# Altium PCB 主板-霍尔BC接地.PcbDoc (part 5 of 6)
Units mm, origin at the board's own origin, x right, y up, seen from the top; angles counter-clockwise.
Board outline 97.69 x 103.45 mm, 2 copper layers (Top Layer, Bottom Layer); 83 components, 83 nets, 266 pads, 295 vias.
Unrouted connection lines stored in the file: 11.
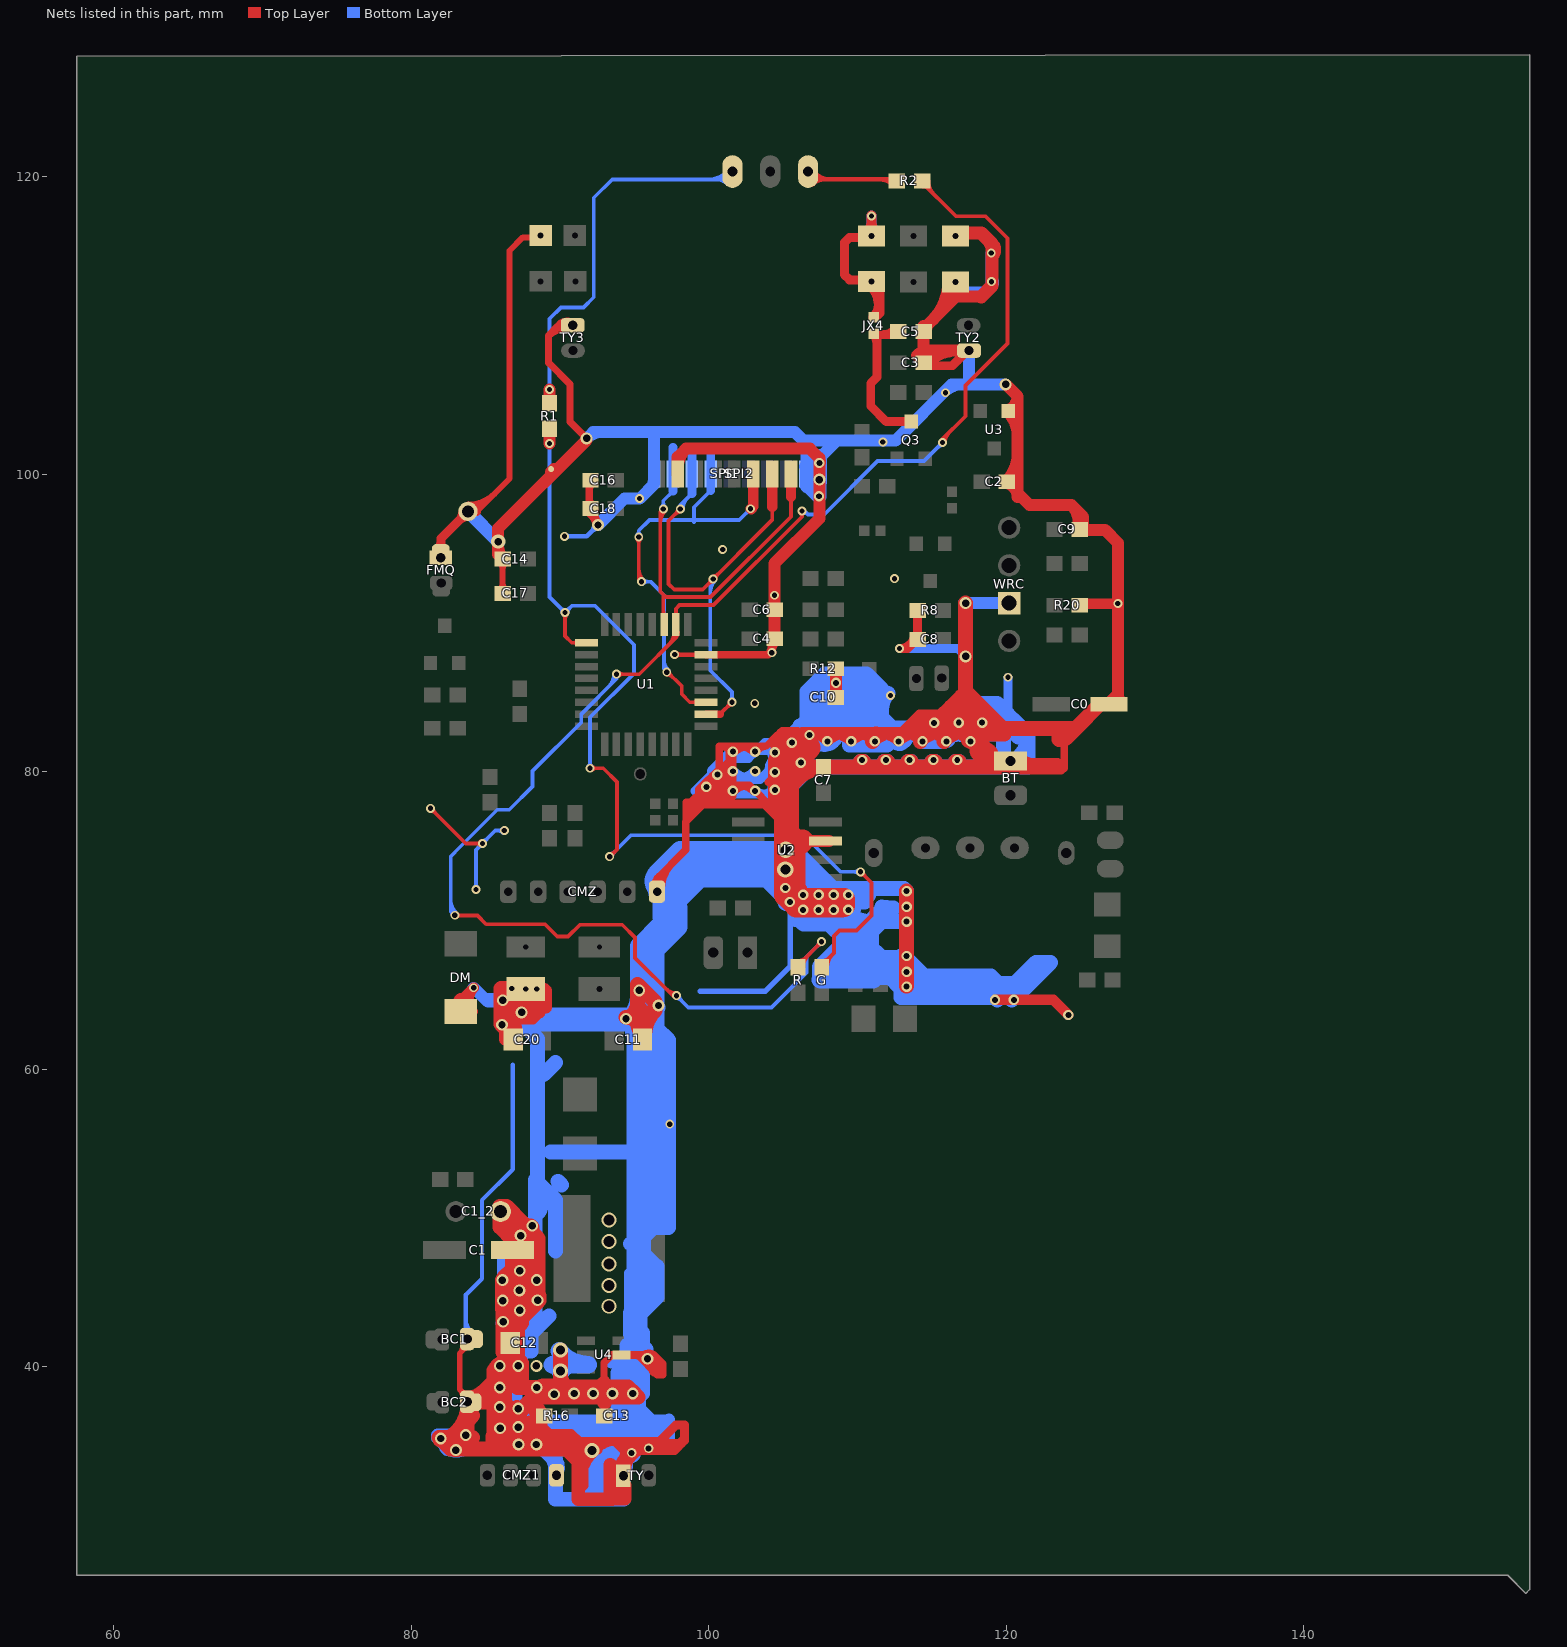
[diagram p5: the nets of this part, all layers, seen from the top]

## Via types
v1: diameter 0.6, hole 0.35, Top Layer to Bottom Layer, 117 vias
v2: diameter 0.7, hole 0.4, Top Layer to Bottom Layer, 104 vias
v3: diameter 0.8, hole 0.5, Top Layer to Bottom Layer, tented both sides, 32 vias
v4: diameter 0.8, hole 0.5, Top Layer to Bottom Layer, 15 vias
v5: diameter 1, hole 0.6, Top Layer to Bottom Layer, tented both sides, 5 vias
v6: diameter 1, hole 0.75, Top Layer to Bottom Layer, tented both sides, 5 vias
v7: diameter 3.4, hole 2.9, Top Layer to Bottom Layer, 4 vias
v8: diameter 0.65, hole 0.4, Top Layer to Bottom Layer, tented both sides, 2 vias
v9: diameter 0.8, hole 0.35, Top Layer to Bottom Layer, 2 vias
v10: diameter 0.7, hole 0.35, Top Layer to Bottom Layer, 2 vias
v11: diameter 1.1, hole 0.68, Top Layer to Bottom Layer, 2 vias
v12: diameter 0.62, hole 0.4, Top Layer to Bottom Layer, 1 vias
v13: diameter 0.95, hole 0.5, Top Layer to Bottom Layer, 1 vias
v14: diameter 0.9, hole 0.5, Top Layer to Bottom Layer, tented both sides, 1 vias
v15: diameter 0.7, hole 0.4, Top Layer to Bottom Layer, tented bottom, 1 vias
v16: diameter 0.8, hole 0.5, Top Layer to Bottom Layer, tented bottom, 1 vias

## Nets (pads, with @x,y where several pads share a name; then routed paths per layer and width w, separated by ;. In a path a pad name is that pad's centre, name@x,y a point inside that pad or via, vN(x,y) a via of type N, cw(c..) or ccw(c..) an arc to the next point about the centre after c; other vN are vias at no path point) (continued)
GND: (continued)
  Bottom Layer w1: 85.209,64.643 v3@86.081,64.643 ; v3@86.024,37.216 ccw(c84.601,38.64) 86.614,38.64 ; v3@86.024,38.679 cw(c84.601,37.255) 86.614,37.255 ; v3@86.024,39.985 ccw(c85.091,40.918) 86.411,40.918 ; v3@86.055,40.005 86.055,39 86.055,36.297 ; 86.081,65.303 v3@86.081,64.643 ; 86.157,63.754 v3@86.157,64.523 ; 86.157,64.037 cw(c87.22,64.037) pad.0@87.204,65.1 ; v3(86.157,64.643) v3@86.081,64.643 ; v3@86.182,42.928 ccw(c86.182,44.403) 87.226,43.36 ; v3@86.198,42.929 ccw(c86.042,43.911) 86.847,43.327 ; v3@86.228,44.521 cw(c85.785,44.078) 86.411,44.078 ; v3@86.258,42.933 86.258,47.6 v3@87.884,49.225 ; 86.385,42.672 86.385,42.52 86.411,42.545 ; 86.411,40.259 86.411,42.545 ; 86.411,41.715 ccw(c88.858,41.715) v3@87.127,39.985 ; 86.411,42.26 cw(c88.388,42.26) v3@87.242,43.871 ; v3@86.411,44.221 86.411,42.545 ; 86.487,42.723 86.643,42.879 ; pad.0@86.521,65.432 87.6,65.432 v10(86.766,65.43) pad.0@86.664,65.429 ; 86.581,36.297 cw(c86.581,35.324) v3@87.269,36.012 ; 86.614,36.195 cw(c87.969,36.195) v3@87.137,37.265 ; 86.614,36.386 86.614,38.938 86.614,39.167 86.843,38.938 ; 86.614,37.11 ccw(c88.367,37.11) 87.127,35.87 ccw(c88.122,36.865) 88.122,35.458 ; 86.614,38.355 ccw(c88.367,38.355) 87.127,37.115 ccw(c89.103,39.09) 89.103,36.297 ; pad.0@86.669,65.316 ccw(c87.241,65.987) pad.0@87.311,65.109 ; 86.792,43.094 cw(c87.689,43.094) v3@87.251,43.877 ; 86.792,43.187 cw(c87.54,43.187) v3@87.263,43.882 ; 86.792,43.314 86.792,43.466 ; 86.87,43.919 ccw(c85.654,45.136) v3@87.374,45.136 ; 86.919,35.458 93.472,35.458 93.294,35.636 93.426,35.636 92.954,36.108 ; 86.92,40.969 cw(c86.007,40.056) v3@87.298,40.056 ; 87.003,35.458 cw(c87.003,33.358) v3@88.488,34.843 ; 87.02,41.275 87.859,41.275 ; v3@87.103,35.97 ccw(c88.054,35.679) 87.351,34.976 86.055,36.271 ; v3@87.127,36.012 cw(c87.815,35.324) 87.815,36.297 ; v3@87.202,43.768 cw(c87.924,43.927) 87.401,44.45 86.589,43.637 cw(c87.21,43.015) v3@87.311,43.889 ; v3@87.205,35.841 cw(c87.102,37.318) 86.055,36.271 ; 87.219,43.353 ccw(c86.783,43.79) v3@87.4,43.79 ; v3@87.28,39.998 ccw(c86.857,40.298) 87.224,40.665 86.868,41.021 86.893,41.046 ; v3@87.292,37.15 cw(c86.055,37.619) 86.055,36.297 ; v3@87.329,63.851 ccw(c88.304,63.648) 87.6,62.944 ; v3@87.33,63.854 ccw(c88.246,63.631) 87.579,62.964 87.6,62.944 ; v3@87.345,45.065 ccw(c86.78,45.63) 87.579,45.63 ; v3@87.345,45.207 cw(c86.78,44.641) 87.579,44.641 ; v3@87.354,43.488 86.411,42.545 ; v3@87.371,46.386 ccw(c86.867,46.89) 87.579,46.89 ; v3@87.371,46.527 cw(c86.867,46.023) 87.579,46.023 ; v3@87.374,45.148 cw(c85.352,44.906) 86.792,43.466 ; v3@87.395,43.82 cw(c86.431,43.509) 87.147,42.792 87.916,43.561 ; 87.482,44.156 cw(c88.494,43.145) v3@88.494,44.575 ; v3@87.579,44.009 cw(c90.212,44.009) v3@88.373,45.893 ; 87.579,44.228 v3@87.579,48.895 ; 87.579,47.665 ccw(c90.286,47.665) v3@88.372,45.751 ; 87.884,44.558 86.792,43.466 ; v3@88.347,34.843 cw(c89.832,33.358) 89.832,35.458 ; v3(88.417,34.773) 88.824,34.773 ; 88.549,50.37 ccw(c87.943,50.859) 88.494,51.41 88.494,62.05 87.6,62.944 ; 88.9,59.639 89.713,60.452 ; 88.926,34.468 89.002,34.544 ; 88.925,34.773 88.824,34.773 ; 89.053,34.595 89.027,34.569 ; 89.129,34.9 88.697,34.9 88.773,34.823 88.824,34.773 ; 89.256,43.409 88.062,42.215 ; 89.293,34.101 cw(c88.143,32.95) 89.77,32.95 ccw(c89.047,33.244) 89.599,33.795 89.027,34.367 89.128,34.468 ; 89.332,34.468 89.129,34.468 ; 89.357,54.432 96.728,54.432 ; 89.672,36.108 92.954,36.108 ; 89.704,47.777 89.704,51.215 88.341,52.578 88.341,43.536 88.062,43.256 ; 89.713,33.757 89.713,31.09 92.903,31.09 94.285,31.09 94.285,31.787 93.844,31.787 ; 89.865,52.476 90.117,52.225 ; 91.774,33.455 ccw(c90.862,34.366) v5(92.151,34.366) ; 91.999,32.029 92.151,32.182 92.522,32.182 ; 92.001,32.125 91.663,31.787 ; 92.402,33.76 cw(c93.009,34.366) v5(92.151,34.366) ; 92.522,33.471 ccw(c91.256,33.471) v5(92.151,34.366) ; 92.522,33.551 ccw(c91.441,33.551) v5(92.151,34.366) ; 92.823,31.787 ccw(c92.823,33.846) TY.2@94.278,32.39 ; 92.954,31.14 93.574,31.14 ; 93.223,32.7 92.804,32.7 93.323,32.182 ; 93.271,33.376 cw(c93.271,31.951) TY.2@94.278,32.958 ; 93.505,31.691 93.601,31.787 ; 93.604,31.671 cw(c94.364,31.671) TY.2@94.261,32.424 ; 93.604,32.085 93.604,32.182 ; 93.604,32.796 cw(c94.231,32.796) TY.2@94.178,33.421 ; 93.955,35.636 93.955,34.976 93.98,34.95 94.386,34.95 94.488,34.849 ; TY.2@94.246,32.936 cw(c95.293,33.383) 94.488,34.188 ; TY.2@94.281,32.933 ccw(c93.648,33.349) 94.183,33.884 ; TY.2@94.283,32.951 ccw(c93.675,32.729) 93.675,33.376 ; TY.2@94.284,32.942 ccw(c92.78,33.141) 93.853,34.214 ; 94.488,33.883 cw(c95.094,33.883) v8@94.706,34.348 ; 94.488,35.707 94.488,34.849 ; 94.615,37.186 94.656,37.144 ; 94.656,36.432 94.656,37.144 ; 94.742,36.108 94.092,36.108 ; 94.755,48.273 95.326,48.844 ; 94.793,42.164 95.555,41.402 ; v4@94.846,38.114 ccw(c95.128,38.625) 95.54,38.212 ; v8@94.901,34.06 cw(c94.481,34.842) 93.853,34.214 ; 94.92,41.758 94.92,39.345 95.225,39.649 ; v4@94.934,38.293 cw(c94.693,37.735) 95.301,37.735 ; 94.971,48.844 95.326,48.844 ; 94.971,62.407 94.971,54.576 ; 95.098,49.835 95.758,50.495 ; 95.148,44.653 95.225,44.729 ; 95.148,46.228 95.148,46.076 ; 95.225,37.391 95.225,39.649 ; 95.225,37.646 ccw(c94.339,37.646) 94.965,38.272 cw(c94.155,37.462) 95.301,37.462 ; 95.225,38.757 cw(c94.339,38.757) 94.965,38.131 ccw(c93.577,39.519) 95.54,39.519 ; 95.225,44.12 95.225,44.729 ; 95.244,34.945 95.148,34.849 94.818,34.519 94.488,34.188 ; 95.326,48.057 95.326,48.844 ; 95.326,50.927 95.326,51.155 ; 95.326,62.763 95.326,54.576 94.971,54.576 ; 95.327,61.713 cw(c97.266,61.713) 95.895,63.084 ; 95.327,62.763 96.52,62.763 ; 95.542,48.628 95.898,48.984 ; 95.555,41.094 ccw(c96.441,41.094) v16@95.814,40.468 ; 95.631,47.498 95.631,48.412 ; 95.682,47.523 96.469,46.736 ; 95.733,48.819 95.898,48.984 ; 95.758,45.339 95.758,47.32 ; 95.824,63.084 cw(c94.758,62.017) 96.266,62.017 ; 95.838,63.074 cw(c95.5,62.386) 96.266,62.386 ; 95.858,63.069 cw(c95.831,62.381) 96.52,62.381 ; 95.898,44.552 95.898,45.402 95.225,44.729 ; 95.898,49.416 95.898,48.984 ; 95.904,63.142 ccw(c96.52,63.454) 96.52,62.763 ; 95.961,49.708 96.19,49.708 ; 96.284,35.456 96.314,35.486 94.656,37.144 ; 96.441,35.486 96.7,35.486 97.231,36.017 ; 96.52,46.761 96.52,44.653 95.377,43.51 95.377,42.469 95.555,42.291 95.555,41.402 ; 96.52,68.123 96.52,62.763 ; CMZ.2@96.53,71.944 97.206,71.944 ; 96.901,55.63 cw(c98.066,55.63) v1@97.242,56.453 ; 96.901,56.994 ccw(c98.066,56.994) v1@97.242,56.17 ; 96.977,49.708 96.622,49.708 95.898,48.984 ; 97.18,36.297 96.139,36.297 95.301,37.135 95.301,37.973 95.54,38.212 95.54,39.882 95.555,39.896 95.555,39.98 ; 103.745,72.836 105.994,70.587 ; 104.111,72.47 ccw(c105.156,73.514) v2@105.156,72.037 ; v2@104.295,79.985 cw(c105.527,79.985) 104.656,80.856 ; v2@104.303,79.935 cw(c104.97,80.17) 104.47,80.67 ; v2@104.445,78.641 ccw(c104.445,80.364) 105.663,79.145 ; v2@104.445,81.155 ccw(c104.445,82.387) 105.316,81.516 ; v2@104.485,81.161 ccw(c104.271,81.94) 105.08,81.94 ; v2@104.507,80.121 cw(c104.099,79.229) 105.08,79.229 ; v2@104.551,79.879 ccw(c103.274,81.155) 105.08,81.155 ; v2@104.551,81.411 cw(c103.275,80.135) 105.08,80.135 ; v2@104.563,80.077 cw(c103.915,79.572) v2@104.496,78.991 ; v2@104.578,81.375 cw(c104.044,81.096) 104.47,80.67 ; v2@105.006,72.187 ccw(c106.484,72.187) v2@105.439,71.142 ; 105.08,81.102 cw(c106.452,81.102) 105.482,82.072 cw(c106.36,81.194) 106.36,82.436 ; 105.08,81.457 cw(c105.77,81.457) v2@105.537,82.107 ; v11@105.181,74.702 cw(c105.181,73.11) 106.307,74.236 ; v11(105.181,74.752) 105.791,74.752 108.382,72.161 108.255,72.161 ; v2@105.438,81.966 cw(c106.241,81.966) 105.673,82.534 ; v2@105.467,82.054 cw(c106.219,81.503) 106.219,82.436 ; v2@105.611,82.114 ccw(c105.516,81.504) 105.08,81.94 ; v2@105.644,81.827 ccw(c105.36,82.533) 106.121,82.533 ; v2@105.694,81.86 ccw(c104.662,82.891) 106.121,82.891 ; 105.782,70.799 ccw(c106.35,71.367) v2@106.35,70.564 ; 105.789,79.271 ccw(c104.441,80.62) v2@106.347,80.62 ; 105.816,70.059 cw(c106.717,70.059) v2@106.276,70.844 ; 105.816,70.099 cw(c106.65,70.099) v2@106.284,70.848 ; v2@106.049,70.641 ccw(c104.961,71.73) v2@106.5,71.73 ; 106.136,72.507 106.451,72.822 ; 106.17,82.371 cw(c106.782,81.76) v2@106.782,82.624 ; v2@106.21,71.675 cw(c107.21,72.063) 106.451,72.822 ; v2@106.216,70.781 ccw(c106.991,70.388) 106.377,69.774 ; v2@106.478,71.807 cw(c105.89,71.453) 106.375,70.968 105.816,70.409 105.816,70.334 106.377,69.774 ; SPI2.8@106.649,99.21 cw(c108.994,99.21) v2@107.336,100.868 ; SPI2.8@106.649,99.963 cw(c107.617,99.963) v2@107.41,100.908 ; v2@106.652,82.398 ccw(c107.249,82.749) 107.249,82.057 ; v2@106.676,82.368 ccw(c107.427,83.119) 107.427,82.057 ; v2@106.755,82.326 cw(c106.89,83.083) 106.121,83.083 ; 106.772,70.485 107.823,70.485 108.382,69.926 ; v2@106.782,82.524 v2@106.87,82.436 ; v2@106.785,82.624 ccw(c106.731,80.289) 105.08,81.94 ; v2@106.812,82.327 cw(c106.657,83.069) 106.121,82.533 ; v2@106.852,82.341 cw(c106.599,82.816) 106.219,82.436 ; 106.959,73.33 106.451,72.822 ; v2@107.016,82.289 ccw(c107.975,83.248) v2@107.975,81.892 ; 107.172,82.525 cw(c107.172,81.239) 108.081,82.148 ccw(c107.387,81.454) 107.387,82.436 ; v2@107.213,71.755 107.569,72.111 ; v4@107.365,99.709 ccw(c108.035,99.145) v2(107.417,98.527) ; v4@107.405,99.551 cw(c107.849,100.666) 106.649,100.666 106.649,99.294 v2(107.417,98.527) ; v2@107.417,98.501 v2(107.417,98.527) ; v4@107.417,99.593 v2(107.417,98.527) ; v2@107.429,71.875 cw(c107.19,70.968) 108.128,70.968 ; v4@107.442,99.492 v4(107.442,99.644) v2(107.442,100.762) v2@107.442,101.092 ; v2@107.449,71.868 cw(c107.024,70.849) v2@108.128,70.849 ; 107.602,85.732 cw(c108.56,84.774) v2@108.56,86.129 ; v2@107.856,82.134 cw(c108.471,81.66) 108.471,82.436 107.975,82.436 ; v2@107.869,82.148 cw(c108.778,81.239) 108.778,82.525 ; 107.975,84.931 cw(c109.608,84.931) 108.454,86.085 cw(c109.669,84.869) 109.669,86.589 ; v2@107.991,81.893 ccw(c107.924,82.525) 108.56,82.525 ; v2@108.034,81.904 cw(c107.754,82.562) 107.249,82.057 ; v2@108.081,81.936 ccw(c106.926,83.091) 108.56,83.091 ; 108.128,71.247 108.128,71.536 108.128,71.958 ; 108.128,71.417 cw(c108.72,71.417) 108.301,71.836 cw(c109.088,71.049) 109.088,72.161 ; v2@108.179,70.915 v2@108.179,70.917 ; 108.229,69.774 106.377,69.774 ; v2@108.279,70.792 ccw(c108.88,70.424) 108.382,69.926 ; 108.376,72.167 cw(c107.938,71.73) v2@108.557,71.73 ; v2@108.407,71.88 cw(c108.407,70.893) v2@109.105,71.591 ; v2@108.458,71.958 108.255,72.161 ; v2@108.511,85.837 cw(c108.77,86.589) 107.975,86.589 ; v2@108.57,86.129 ccw(c108.422,83.958) 106.883,85.496 ; 108.636,72.06 v2@109.195,71.501 ; v2@108.664,86.087 ccw(c108.31,85.721) 107.95,86.081 ; v2@108.692,86.049 ccw(c107.798,85.577) 107.798,86.589 ; 108.717,72.161 cw(c108.717,71.049) v2@109.504,71.836 ; 108.772,82.525 cw(c108.772,81.239) v2@109.681,82.148 ; 108.917,71.779 ccw(c109.398,72.26) v2@109.398,71.58 ; 109.02,71.64 ccw(c109.295,72.115) v2@109.437,71.585 ; v2@109.292,70.608 ccw(c110.937,72.252) 110.937,69.926 ; v2@109.292,70.82 cw(c110.323,69.788) 110.323,71.247 ; v2@109.292,71.624 ccw(c110.201,72.533) 110.201,71.247 ; v2@109.292,71.836 cw(c110.078,71.049) 110.078,72.161 ; 109.449,71.247 110.49,71.247 110.236,71.501 ; 109.466,86.335 109.466,82.525 ; v2@109.469,81.936 ccw(c109.826,82.293) 109.826,81.788 ; v2@109.469,82.148 cw(c110.378,81.239) 110.378,82.525 ; 109.509,80.315 ccw(c109.509,81.6) v2@110.418,80.691 ; 109.728,86.233 110.363,85.598 110.363,82.781 110.583,82.561 ; v2@110.206,80.691 ccw(c111.115,81.6) 111.115,80.315 ; 110.372,82.525 cw(c110.372,81.239) v2@111.281,82.148 ; 110.924,81.788 ccw(c110.924,82.293) v2@111.281,81.936 ; 111.049,85.649 111.049,83.026 110.583,82.561 ; v2@111.069,81.936 ccw(c111.426,82.293) 111.426,81.788 ; v2@111.069,82.148 cw(c111.978,81.239) 111.978,82.525 ; 111.109,80.315 ccw(c111.109,81.6) v2@112.018,80.691 ; v2@111.151,81.894 cw(c111.259,82.561) 110.583,82.561 ; v2@111.174,81.892 cw(c111.18,82.488) 110.583,82.488 ; 111.633,70.917 112.42,70.841 ; 111.633,84.213 cw(c113.145,84.213) v1@112.076,85.282 ; v2@111.806,80.691 ccw(c112.715,81.6) 112.715,80.315 ; 111.972,82.525 cw(c111.972,81.239) 112.881,82.148 ccw(c112.493,81.76) 112.493,82.309 ; 112.129,81.924 cw(c112.775,81.277) v2@112.775,82.192 ; v2@112.669,82.148 cw(c113.578,81.239) 113.578,82.525 ; v2@112.677,81.929 cw(c113.785,83.208) 112.092,83.208 ; 112.709,80.315 ccw(c112.709,81.6) v2@113.618,80.691 ; v2@112.797,81.894 ccw(c112.705,82.525) 113.342,82.525 ; 112.928,65 cw(c113.867,65) v2@113.203,65.663 ; 112.928,65.99 cw(c113.867,65.99) v2@113.203,66.654 ; 112.928,66.115 ccw(c113.867,66.115) v2@113.203,65.451 ; 112.928,67.106 ccw(c113.867,67.106) v2@113.203,66.442 ; 113.005,65.354 113.411,64.948 cw(c114.018,65.555) v2@113.159,65.558 ; v2@113.03,66.523 113.513,66.04 ; v2@113.081,66.472 cw(c112.166,65.557) v2@113.459,65.557 ; v2@113.132,72.161 108.255,72.161 ; v2@113.159,66.548 ccw(c114.453,66.548) v2@113.538,65.633 ; v2@113.164,66.584 ccw(c113.981,66.381) v2@113.386,65.786 ; v2@113.165,65.597 cw(c114.046,65.355) 114.046,66.269 ; v2@113.181,65.48 ccw(c114.351,66.188) 114.351,64.821 ; v2@113.294,66.697 cw(c113.449,65.214) 114.503,66.269 ; v2@113.309,66.269 114.046,66.269 ; v2@113.309,70.612 v2(113.309,69.926) 111.506,69.926 110.952,69.926 109.017,69.926 108.382,69.926 ; v2(113.309,70.917) v2(113.309,71.984) ; 113.342,82.448 113.342,82.525 ; v2@113.406,80.691 ccw(c114.315,81.6) 114.315,80.315 ; v2@113.454,66.509 ccw(c112.346,66.804) v2@113.157,67.615 ; 113.572,82.525 cw(c113.572,81.239) v2@114.481,82.148 ; 113.686,82.525 ccw(c113.686,84.764) v2@115.27,83.181 ; 113.868,65.786 v2@113.386,65.786 ; v2@114.269,82.148 cw(c115.178,81.239) 115.178,82.525 ; 114.275,65.913 114.63,65.557 114.757,65.43 ; 114.309,80.315 ccw(c114.309,81.6) v2@115.218,80.691 ; v2(114.375,82.042) 115.545,82.042 116.027,82.525 ; v2@115.006,80.691 ccw(c115.915,81.6) 115.915,80.315 ; v2@115.022,83.237 ccw(c116.027,83.59) 116.027,82.525 ; 115.172,82.525 cw(c115.172,81.239) v2@116.081,82.148 ; v2@115.869,82.148 cw(c116.778,81.239) 116.778,82.525 ; 115.909,80.315 ccw(c115.909,81.6) v2@116.818,80.691 ; v2@116.606,80.691 ccw(c117.515,81.6) 117.515,80.315 ; v2@116.709,83.206 ccw(c118.353,84.851) 118.353,82.525 ; 116.799,82.525 cw(c116.799,81.239) v2@117.708,82.148 ; 116.851,82.525 ccw(c116.851,84.851) v2@118.495,83.206 ; v2@116.961,83.281 cw(c116.027,83.48) 116.027,82.525 ; v2@117.496,82.148 cw(c118.405,81.239) 118.405,82.525 ; v2@118.26,83.236 ccw(c119.507,83.973) 119.507,82.525 ; 118.497,80.315 ccw(c118.497,82.074) BT.2@119.741,80.83 ; 119.114,65.366 cw(c118.416,64.668) v2@119.403,64.668 ; BT.2@119.809,80.579 ccw(c119.548,79.595) 118.828,80.315 ; BT.2@119.93,80.491 ccw(c120.163,80.557) BT.2@120.163,80.315 ; BT.2@120.297,80.674 BT.2@120.297,80.315 ; 120.371,65.507 120.802,65.938 ; v2@120.373,64.668 cw(c121.789,64.668) 120.788,65.67 ; BT.2@120.657,80.844 ccw(c119.425,82.499) 121.488,82.499 ; 120.828,82.321 119.99,83.16 119.99,83.287 ; 120.853,65.735 119.939,64.821 ; BT.2@120.891,80.765 ccw(c121.488,80.936) 121.488,80.315 ; 86.055,36.271 86.055,36.297 ; 86.055,36.297 92.765,36.297 92.954,36.108 ; 86.893,41.046 88.062,41.046 88.062,42.215 ; 86.893,41.046 86.893,42.088 88.062,43.256 ; 88.062,42.215 88.062,43.256 ; v3@88.347,34.702 ccw(c88.911,35.266) 88.911,34.468 ; v3@88.347,34.702 ccw(c88.911,35.266) 88.911,34.468 ; v3@88.347,34.702 ccw(c88.912,35.267) 88.912,34.468 ; v3@88.347,34.702 ccw(c88.912,35.267) 88.912,34.468 ; v3@88.417,34.873 cw(c88.417,34.133) 88.94,34.656 ; v3@88.417,34.873 cw(c88.417,34.133) 88.94,34.656 ; v3@88.417,34.873 cw(c88.417,34.133) 88.94,34.656 ; v3@88.417,34.873 cw(c88.417,34.133) 88.94,34.656 ; v3@88.417,34.873 cw(c88.417,34.133) 88.94,34.656 ; v3@88.417,34.873 cw(c88.417,34.256) 88.854,34.692 ccw(c88.417,34.256) v3@88.417,34.873 ; v3@88.417,34.873 cw(c88.417,34.133) 88.94,34.656 ; v3@88.417,34.873 cw(c88.417,34.133) 88.94,34.656 ; 88.824,34.773 88.951,34.646 ; 88.951,34.646 89.027,34.569 ; 88.951,34.646 88.9,34.646 89.002,34.544 ; 89.002,34.544 89.027,34.569 ; 89.027,34.569 89.128,34.468 ; 89.128,34.468 91.109,34.468 ; 91.109,34.468 ccw(c91.692,35.051) v5(92.151,34.366) ; 91.109,34.468 91.948,33.629 ; 91.109,34.468 94.107,34.468 94.488,34.849 ; 91.567,31.691 92.403,31.691 92.499,31.787 ; 91.567,31.691 91.567,33.248 91.694,33.376 ; 91.567,31.691 91.663,31.787 ; 91.663,31.787 92.499,31.787 ; 91.694,33.376 91.948,33.629 ; 91.694,33.376 91.981,33.376 ; 91.948,33.629 ccw(c91.401,34.176) v5(92.151,34.366) ; 91.981,33.376 92.522,33.376 ; 91.981,33.376 92.522,32.835 ; 92.499,31.787 93.601,31.787 ; 92.499,31.787 92.522,31.81 92.522,32.182 ; 92.522,32.182 93.323,32.182 ; 92.522,32.182 92.522,32.835 ; 92.522,32.835 92.522,33.376 ; 92.522,32.835 93.063,33.376 ; 92.522,33.376 93.063,33.376 ; 92.522,33.376 92.522,33.64 91.948,34.214 93.853,34.214 ; 92.954,36.108 93.523,36.678 94.092,36.108 ; 92.954,36.108 94.092,36.108 ; 93.063,33.376 93.604,33.376 ; 93.323,32.182 93.659,31.845 93.601,31.787 ; 93.323,32.182 93.604,32.182 ; 93.601,31.787 ccw(c93.601,32.474) 94.284,32.402 cw(c93.601,32.474) 93.601,31.787 ; 93.601,31.787 93.844,31.787 ; 93.604,32.182 93.604,33.376 ; 93.604,32.182 94.239,32.182 93.844,31.787 ; 93.604,33.376 cw(c93.604,32.62) 94.282,32.953 ccw(c93.604,32.62) 93.604,33.376 ; 93.604,33.376 93.675,33.376 ; 93.675,33.376 94.183,33.884 ; 93.775,32.182 ccw(c93.775,32.893) TY.2@94.278,32.39 ; 93.775,32.182 ccw(c93.775,32.893) TY.2@94.278,32.39 ; 93.775,32.182 ccw(c93.775,32.893) TY.2@94.278,32.39 ; 93.775,32.182 ccw(c93.775,32.893) TY.2@94.278,32.39 ; 93.775,32.182 ccw(c93.775,32.893) TY.2@94.278,32.39 ; 93.853,34.214 94.183,33.884 ; 94.183,33.884 94.488,34.188 ; 94.488,34.188 94.488,34.519 94.488,34.849 ; 94.488,34.588 ccw(c95.193,34.588) v8@94.694,34.09 ; 94.488,34.588 ccw(c95.193,34.588) v8@94.694,34.09 ; 94.488,34.588 ccw(c95.193,34.588) v8@94.694,34.09 ; 94.971,54.576 94.971,46.253 95.148,46.076 ; 95.148,46.076 95.225,46.152 95.225,44.729 ; 95.225,39.649 95.555,39.98 ; 95.555,39.98 95.555,41.402 ; 95.555,39.98 95.783,40.208 95.783,41.173 95.555,41.402 ; 95.555,39.983 cw(c96.441,39.983) v16@95.814,40.609 ; 95.555,39.983 cw(c96.441,39.983) v16@95.814,40.609 ; 95.555,39.983 cw(c96.441,39.983) v16@95.814,40.609 ; 95.758,50.495 95.327,50.926 95.327,54.576 96.266,54.576 ; 95.758,50.495 96.368,49.886 ; v16@95.814,40.609 ccw(c96.476,39.947) 95.54,39.947 cw(c96.476,39.947) v16@95.814,40.609 ; 95.86,63.069 cw(c95.86,62.151) 96.509,62.8 ccw(c95.86,62.151) 95.86,63.069 ; 95.86,63.069 cw(c95.86,62.212) 96.465,62.818 ccw(c95.86,62.212) 95.86,63.069 ; 96.266,54.576 96.266,50.063 96.368,50.165 96.368,49.886 ; 96.266,54.576 96.266,62.509 96.901,61.874 96.901,50.419 96.368,49.886 ; 96.368,49.886 95.834,49.352 97.307,49.352 97.307,61.976 96.52,62.763 ; 96.674,35.846 ccw(c96.502,36.017) 96.745,36.017 ; 96.674,35.846 ccw(c96.502,36.017) 96.745,36.017 ; 96.674,35.846 ccw(c96.502,36.017) 96.745,36.017 ; 104.47,80.67 104.47,78.965 104.696,78.74 105.258,78.74 106.832,80.315 118.828,80.315 ; 104.47,80.67 104.496,80.696 ; v2@104.496,78.991 104.496,80.696 ; v2@104.496,78.991 105.08,79.575 105.08,81.94 ; 104.496,80.696 ccw(c105.039,80.154) 104.301,79.944 cw(c105.039,80.154) 104.496,80.696 ; 104.496,80.696 ccw(c104.104,81.088) 104.572,81.386 cw(c104.104,81.088) 104.496,80.696 ; 104.496,80.696 106.235,82.436 ; 105.08,81.94 106.604,83.464 106.604,85.395 107.798,86.589 ; 105.308,79.198 ccw(c105.308,80.181) 106.004,79.486 ; 105.308,79.198 ccw(c105.308,80.181) 106.004,79.486 ; 105.308,79.198 ccw(c105.308,80.181) 106.004,79.486 ; 105.321,79.2 ccw(c105.05,80.211) 105.957,79.688 ; 105.321,79.2 ccw(c105.05,80.211) 105.957,79.688 ; 105.321,79.2 ccw(c105.05,80.211) 105.957,79.688 ; 105.321,79.2 ccw(c105.05,80.211) 105.957,79.688 ; 105.321,79.2 ccw(c105.05,80.211) 105.957,79.688 ; 105.321,79.2 ccw(c105.05,80.211) 105.957,79.688 ; 106.121,82.533 106.219,82.436 ; 106.121,82.533 106.121,83.083 ; 106.121,83.083 v2@106.68,82.525 ; 106.219,82.436 106.235,82.436 ; 106.235,82.436 cw(c106.704,81.967) 106.804,82.622 ccw(c106.704,81.967) 106.235,82.436 ; 106.235,82.436 ccw(c106.235,81.47) 105.469,82.057 cw(c106.235,81.47) 106.235,82.436 ; 106.235,82.436 v2@106.87,82.436 ; 106.235,82.436 106.324,82.525 v2@106.68,82.525 ; v2@106.68,82.525 v2@106.782,82.525 ; v2@106.782,82.525 v2@106.931,82.525 ; v2@106.782,82.525 106.782,84.303 ; 106.782,84.303 107.15,84.671 ; 106.782,84.303 106.782,84.379 107.112,84.709 107.15,84.671 ; v2@106.87,82.436 107.975,82.436 ; v2@106.87,82.436 107.249,82.057 ; 106.883,85.496 106.883,85.014 107.95,86.081 ; 106.883,85.496 107.975,86.589 ; v2@106.931,82.525 107.975,82.525 ; v2@106.931,82.525 107.442,83.036 107.442,84.379 107.15,84.671 ; 107.15,84.671 107.975,85.496 ; 107.249,82.057 107.927,82.057 107.975,82.105 107.975,82.436 ; 107.798,86.589 110.617,86.589 111.633,85.573 111.633,83.668 112.092,83.208 ; 107.95,86.081 107.975,86.081 ; 107.975,82.436 107.975,82.525 ; 107.975,82.525 108.56,82.525 ; 107.975,82.525 107.975,85.496 ; 107.975,85.496 107.975,86.081 ; 107.975,85.496 v2@108.56,86.081 ; 107.975,86.081 v2@108.56,86.081 ; 107.975,86.081 107.975,86.589 ; 108.56,82.525 ccw(c108.56,81.695) 107.846,82.119 cw(c108.56,81.695) 108.56,82.525 ; 108.56,82.525 v2@108.56,86.081 ; 108.56,82.525 109.466,82.525 ; 109.466,82.525 109.466,81.788 111.992,81.788 112.513,82.309 112.308,82.309 112.092,82.525 ; 109.466,82.525 110.583,82.525 ; 110.583,82.488 110.62,82.525 ; 110.583,82.488 110.583,82.525 ; 110.583,82.525 cw(c110.583,81.682) 111.303,82.12 ccw(c110.583,81.682) 110.583,82.525 ; 110.583,82.525 ccw(c111.218,82.525) 111.162,81.893 cw(c111.218,82.525) 110.583,82.525 ; 110.583,82.525 110.583,82.561 ; 110.583,82.525 110.62,82.525 ; 110.583,82.561 110.62,82.525 ; 110.62,82.525 cw(c110.62,81.744) 111.307,82.113 ccw(c110.62,81.744) 110.62,82.525 ; 110.62,82.525 112.092,82.525 ; 112.092,82.525 cw(c112.092,81.508) 112.893,82.134 ccw(c112.092,81.508) 112.092,82.525 ; 112.092,82.525 113.342,82.525 ; 112.092,82.525 112.092,83.208 ; 112.092,83.208 112.344,82.956 114.19,82.956 114.605,83.371 116.926,83.371 117.717,84.162 118.162,84.607 119.38,84.607 120.117,83.871 120.701,83.287 ; v2@113.157,67.615 114.503,66.269 ; v2@113.157,67.615 112.928,67.615 112.928,67.386 112.928,66.624 112.928,66.548 112.928,65.564 112.928,65.557 112.928,64.821 114.351,64.821 ; v2@113.203,66.442 ccw(c113.622,66.86) 113.622,66.269 ; v2@113.203,66.442 ccw(c113.622,66.86) 113.622,66.269 ; v2@113.203,66.442 ccw(c113.622,66.86) 113.622,66.269 ; 113.342,82.525 ccw(c113.342,81.725) 112.644,82.115 cw(c113.342,81.725) 113.342,82.525 ; 113.342,82.525 116.027,82.525 ; v2@113.386,65.786 113.614,65.557 114.351,64.821 ; 114.046,66.269 114.503,66.269 ; 114.351,64.821 v2@119.456,64.821 ; 114.503,66.269 114.986,65.786 118.694,65.786 ; 114.503,66.269 118.974,66.269 119.456,65.786 ; v2@115.825,82.042 cw(c116.503,82.042) 116.024,82.521 ; v2@115.825,82.042 cw(c116.503,82.042) 116.024,82.521 ; v2@115.825,82.042 cw(c116.503,82.042) 116.024,82.521 ; 116.027,82.525 119.507,82.525 ; 116.027,82.525 116.789,83.287 117.907,83.287 119.99,83.287 ; 118.694,65.786 119.456,65.786 ; 118.694,65.786 119.456,65.024 ; 118.828,80.315 ccw(c118.828,81.373) 119.72,80.805 cw(c118.828,81.373) 118.828,80.315 ; 118.828,80.315 119.812,81.299 119.812,82.829 119.507,82.525 ; 118.828,80.315 BT.2@120.297,80.315 ; v2@119.456,64.821 119.659,64.821 ; v2@119.456,64.821 119.456,65.024 ; 119.456,65.024 119.659,64.821 ; 119.456,65.024 119.456,65.786 ; 119.456,65.786 120.599,65.786 121.996,67.183 122.987,67.183 120.625,64.821 119.939,64.821 ; 119.659,64.821 119.939,64.821 ; 119.99,83.287 120.701,83.287 ; BT.2@120.297,80.315 121.488,80.315 ; 120.701,83.287 121.488,82.499 ; 121.488,80.315 121.488,82.499 ; v3@87.371,43.719 ccw(c86.867,44.223) 87.579,44.223 cw(c86.867,44.223) v3@87.371,43.719 ; 93.604,31.707 cw(c94.323,31.707) 94.262,32.424 ccw(c94.323,31.707) 93.604,31.707 ; v2@106.091,80.514 ccw(c106.571,80.993) 106.571,80.315 cw(c106.571,80.993) v2@106.091,80.514 ; 107.975,85.221 cw(c109.004,85.221) 108.484,86.108 ccw(c109.004,85.221) 107.975,85.221 ; 108.128,71.026 ccw(c108.72,71.026) 108.301,70.608 cw(c108.72,71.026) 108.128,71.026 ; v2@109.241,71.455 cw(c108.5,70.714) 109.548,70.714 ccw(c108.5,70.714) v2@109.241,71.455 ; 112.928,65.176 cw(c113.508,65.176) 113.24,65.69 ccw(c113.508,65.176) 112.928,65.176 ; 112.928,66.167 cw(c113.508,66.167) 113.24,66.681 ccw(c113.508,66.167) 112.928,66.167
  Bottom Layer w1.2: v3@87.517,63.652 ccw(c86.952,64.77) pad.0@88.205,64.77 ; pad.0@88.028,64.948 pad.0@88.205,64.77 ; 88.205,63.686 pad.0@88.205,64.77 ; 89.831,63.144 89.84,63.144 94.894,63.144 ; v5@89.965,41.06 ccw(c91.897,42.607) 91.897,40.132 89.484,40.132 cw(c89.484,39.365) v5@90.127,39.784 ; v5@89.972,39.8 cw(c90.775,38.997) 90.775,40.132 ; v3@94.385,63.207 ccw(c94.604,63.949) 95.152,63.402 94.894,63.144 ; v3@94.583,63.257 ccw(c92.79,65.05) v3@95.326,65.05 ; 94.615,37.186 94.615,41.395 ; 94.971,62.407 95.326,62.763 ; 95.326,63.754 95.326,68.301 96.825,69.799 ; 95.327,62.763 95.708,63.144 ; v3@95.472,65.162 ccw(c95.028,65.606) 95.656,65.606 ; v3@95.472,65.445 cw(c95.028,65.001) 95.656,65.001 ; 95.656,64.033 95.656,66.345 ; 95.656,66.146 ccw(c98.485,66.146) v3@96.485,64.146 ; 95.656,66.712 95.656,67.632 ; 96.241,63.677 95.708,63.144 ; CMZ.2@96.48,72.144 cw(c98.94,72.144) 97.2,73.883 ; CMZ.2@96.492,72.111 cw(c97.101,72.642) 96.53,73.213 ; 96.52,68.123 97.968,69.571 97.968,70.866 ; CMZ.2@96.522,72.095 ccw(c96.651,72.869) 97.206,72.314 ; CMZ.2@96.53,72.094 ccw(c96.53,73.194) 97.308,72.416 ; CMZ.2@96.536,72.193 cw(c96.446,71.439) 97.206,71.439 ; CMZ.2@96.565,71.779 cw(c95.939,71.153) 96.825,71.153 ; 97.206,71.944 97.206,72.314 ; 97.307,71.166 97.53,70.944 ; 97.866,71.944 97.866,71.28 ; 98.867,73.203 98.867,73.975 97.206,72.314 ; 99.455,72.836 102.173,72.836 ; 99.466,73.152 99.466,73.99 100.576,73.99 ; 99.606,72.885 101.473,74.752 v11(105.181,74.752) ; 101.295,73.711 104.49,73.711 ; 101.987,73.863 102.593,73.256 ; 103.84,72.836 ccw(c103.84,74.748) v11@105.191,73.396 ; 104.192,72.836 cw(c104.192,71.223) v2@105.333,72.364 ; v2@104.979,72.01 ccw(c106.124,73.154) v2@106.124,71.536 ; v2@104.979,72.364 cw(c106.085,71.257) 106.085,72.822 ; v2@105.05,72.413 cw(c105.457,71.543) 106.136,72.222 ; v11@105.054,73.431 102.768,73.431 102.593,73.256 ; v11@105.12,73.397 ccw(c106.451,74.651) 106.451,72.822 ; v11@105.121,73.467 cw(c106.078,72.51) 106.078,73.863 ; v11@105.135,74.733 ccw(c106.426,75.256) 106.426,73.863 ; v11@105.181,73.863 106.426,73.863 ; v11@105.206,73.429 cw(c104.583,73.46) 104.583,72.836 ; v2@105.211,71.247 cw(c106.041,71.247) 105.454,71.834 ; v2@105.219,71.312 cw(c105.964,71.112) 105.579,71.78 ; v2@105.284,71.424 cw(c106.881,69.827) 106.881,72.085 ; v2@105.391,72.273 ccw(c104.583,71.975) 104.583,72.836 ; v2@105.405,72.205 cw(c104.549,72.143) 105.156,71.536 ; 105.461,72.822 106.451,72.822 ; 105.994,72.365 106.136,72.222 ; 106.095,72.085 cw(c106.095,71.475) v2@106.527,71.906 ; 106.136,72.507 106.136,72.222 ; v2@106.173,70.89 cw(c107.732,69.332) 107.732,71.536 ; v2@106.173,71.906 cw(c106.605,71.475) 106.605,72.085 ; v2@106.305,70.96 cw(c106.611,69.273) 107.823,70.485 106.772,71.536 ; v2@106.372,71.979 ccw(c106.239,70.453) 105.156,71.536 ; v2@106.527,70.537 ccw(c105.934,71.129) 106.772,71.129 ; v2@106.527,70.89 cw(c105.934,70.298) 106.772,70.298 ; v2@106.545,70.87 ccw(c105.156,69.755) 105.156,71.536 ; 106.772,70.054 cw(c107.797,70.054) v2@107.26,70.927 ; 106.772,70.485 106.772,71.536 ; 106.772,70.838 cw(c108.283,70.838) v2@107.214,71.906 ; 106.772,71.081 cw(c107.777,71.081) v2@107.264,71.945 ; 106.959,73.33 106.426,73.863 ; 107.025,71.536 cw(c107.025,69.332) 108.584,70.89 cw(c107.539,69.845) 109.017,69.845 ; 107.136,72.085 cw(c107.136,71.475) v2@107.568,71.906 ; v2@107.141,71.73 ccw(c108.5,71.73) v2@107.539,70.769 ; v2@107.149,70.775 cw(c108.128,70.526) v2@108.128,71.536 ; 107.163,72.822 106.451,72.822 ; 107.213,72.085 105.705,72.085 105.156,71.536 ; v2@107.225,70.527 cw(c108.122,71.536) 106.772,71.536 ; v2@107.446,70.862 ccw(c108.407,71.822) v2@108.407,70.464 ; v2@107.64,70.733 ccw(c106.772,70.665) 106.772,71.536 ; v2@108.157,70.714 ccw(c109.516,70.714) 108.555,69.753 ; v2@108.168,70.787 ccw(c108.989,70.534) 108.382,69.926 108.737,69.571 ; v2@108.174,70.805 cw(c109.195,70.405) v2@109.195,71.501 ; 108.179,71.12 108.179,71.145 ; 108.229,69.774 108.433,69.571 ; v2@108.23,71.906 cw(c108.601,71.536) 108.601,72.06 ; v2@108.583,70.891 cw(c107.554,69.852) 109.017,69.852 ; 108.636,72.06 110.414,72.06 110.693,71.78 110.414,71.501 110.236,71.501 ; 108.763,67.132 108.89,67.132 108.89,68.199 ; 108.88,71.536 v2@108.128,71.536 ; v2@109.171,70.818 cw(c110.236,70.329) 110.236,71.501 ; 109.204,72.06 cw(c109.204,71.536) v2@109.575,71.906 ; v2@109.221,71.906 cw(c109.591,71.536) 109.591,72.06 ; v2@109.485,70.479 cw(c109.128,71.435) v2(108.407,70.714) 109.017,70.104 109.017,69.926 109.017,69.291 ; v2@109.646,70.745 ccw(c108.788,70.637) 108.788,71.501 v2@109.195,71.501 ; 112.928,65.557 v2(113.309,65.557) 113.614,65.557 114.63,65.557 114.757,65.557 114.046,66.269 112.928,67.386 112.888,67.427 112.126,67.427 ; 112.928,65.564 112.238,66.254 ; 94.894,63.144 95.708,63.144 ; 96.53,73.213 98.069,74.752 101.338,74.752 100.576,73.99 ; 96.53,73.213 CMZ.2@96.53,71.944 96.825,71.649 96.825,70.239 97.53,70.944 ; 97.53,70.944 97.866,71.28 ; 97.53,70.944 97.866,70.608 97.866,71.28 ; 97.866,71.28 100.576,73.99 ; 102.173,72.836 103.014,72.836 ; 102.173,72.836 102.593,73.256 ; 102.593,73.256 103.014,72.836 ; 103.014,72.836 103.745,72.836 104.583,72.836 ; 105.156,71.536 106.772,71.536 ; v2@106.527,71.906 cw(c105.934,71.314) 106.772,71.314 ccw(c105.934,71.314) v2@106.527,71.906 ; 106.772,71.536 v2@108.128,71.536 ; 108.433,69.571 108.737,69.571 ; 108.433,69.571 108.89,69.113 ; 108.737,69.571 108.89,69.418 ; 108.89,68.199 109.017,68.326 109.017,68.936 ; 108.89,68.199 107.559,66.869 107.559,66.06 107.518,66.019 111.046,66.019 111.282,66.254 112.079,66.254 ; 108.89,68.199 108.89,69.063 ; 108.89,69.063 109.017,68.936 ; 108.89,69.063 108.89,69.113 ; 108.89,69.113 108.89,69.418 ; 108.89,69.113 109.017,68.986 ; 108.89,69.418 109.017,69.291 ; 109.017,68.936 109.677,68.275 109.703,68.301 109.017,68.986 ; 109.017,68.936 109.017,68.986 ; 109.017,68.986 109.017,69.291 ; 109.017,69.291 109.779,68.529 ; 109.017,70.397 cw(c109.714,70.397) v2@109.221,70.89 ; 109.017,70.397 cw(c109.714,70.397) v2@109.221,70.89 ; 109.017,70.397 cw(c109.714,70.397) v2@109.221,70.89 ; 109.017,70.397 cw(c109.714,70.397) v2@109.221,70.89 ; v2@109.195,71.501 110.236,71.501 ; 109.779,67.996 109.957,68.174 109.957,67.615 110.871,66.7 111.252,67.081 112.079,66.254 ; 109.779,67.996 108.458,66.675 108.661,66.472 109.779,66.472 109.779,67.996 ; 109.779,67.996 109.779,68.529 ; 109.779,68.529 109.779,69.266 110.846,69.266 110.861,69.281 ; 109.779,68.529 110.693,67.615 110.744,67.666 110.846,67.666 110.896,67.615 111.378,67.615 ; 110.861,69.281 111.506,69.926 112.187,70.607 111.633,70.607 110.952,69.926 110.861,69.835 110.861,69.281 ; 110.861,69.281 110.861,68.132 111.378,67.615 ; 111.378,67.615 111.566,67.427 112.126,67.427 ; 112.079,66.254 112.238,66.254 ; 112.126,67.427 112.928,66.624 113.005,66.548 112.928,66.548 112.635,66.254 112.238,66.254 ; v2@113.309,66.798 cw(c113.309,66.298) 113.663,66.651 ; v2@113.309,66.798 cw(c113.309,66.298) 113.663,66.651 ; v2@113.309,66.798 cw(c113.309,66.298) 113.663,66.651 ; 113.413,66.902 cw(c113.059,66.548) v2@113.559,66.548 ; 113.413,66.902 cw(c113.059,66.548) v2@113.559,66.548 ; 113.413,66.902 cw(c113.059,66.548) v2@113.559,66.548 ; 104.602,73.711 cw(c104.602,72.878) 105.191,73.467 ccw(c104.602,72.878) 104.602,73.711
  Bottom Layer w1.5: v11@105.181,72.923 105.181,73.863 v11@105.181,74.574 ; v11@105.326,73.326 ccw(c104.466,73.859) v11@105.181,74.574 ; v11@105.33,73.333 ccw(c104.408,73.852) 105.156,74.6 v11@105.181,74.574
  other v1: 97.384,56.312 103.099,84.607 112.217,85.141 104.246,88.011 127.508,91.313 104.419,91.872 112.497,92.985 100.94,94.95 111.709,102.184 115.926,105.486 119.024,112.954
  other v2: 106.35,70.714 107.391,70.714 109.398,70.714 105.461,71.247 106.35,71.73 107.391,71.73 108.407,71.73 109.398,71.73 104.445,78.791 104.445,79.985 103.124,80.038 106.197,80.62 110.312,80.797 111.912,80.797 113.512,80.797 115.112,80.797 116.712,80.797 104.445,81.305 101.629,81.356 107.975,82.042 109.575,82.042 111.175,82.042 112.775,82.042 115.975,82.042 106.782,82.474 115.164,83.287 118.389,83.312 108.56,85.979
  other v3: 83.007,34.392 87.224,34.773 87.198,35.941 85.954,37.287 87.198,40.056 88.417,40.056 86.182,43.028 87.3,43.79 86.157,44.45 88.494,44.475 87.274,45.136 88.443,45.822 87.3,46.457 87.351,48.819 88.138,49.479 95.331,65.303
  other v6: 93.294,44.069 93.294,45.466 93.294,46.914 93.294,48.412 93.294,49.86
HWKZ: 
HWPOW: C5.2 JX4.1 JX4.2 pad.0@110.95,112.956 pad.0@110.95,116.032 Q3.3 | length 27.8
  Top Layer w0.6: pad.0@110.95,112.956 110.837,113.069 109.478,113.069 109.124,113.423 109.124,115.583 109.478,115.937 110.855,115.937 pad.0@110.95,116.032 ; JX4.1@111.065,109.414 cw(c110.49,108.839) 111.303,108.839 ; 111.729,109.398 ccw(c111.729,110.571) C5.2@112.559,109.741 ; C5.2@112.878,109.398 111.303,109.398 111.303,106.528 110.896,106.121 110.896,104.597 111.944,103.55 Q3.3@113.614,103.55
  Top Layer w0.7: pad.0@110.703,116.279 ccw(c110.105,116.877) 110.95,116.877 ccw(c111.795,116.877) pad.0@111.197,116.279 ; pad.0@110.903,112.708 cw(c109.568,111.374) 111.455,111.374 ; pad.0@110.95,112.956 111.455,112.451 111.455,110.855 JX4.2@111.323,110.723 ; pad.0@110.95,116.006 v1(110.95,117.373) ; JX4.2@111.1,110.55 ccw(c110.242,111.407) 111.455,111.407
  Bottom Layer w0.7: pad.0@110.703,116.279 ccw(c110.105,116.877) 110.95,116.877 ccw(c111.795,116.877) pad.0@111.197,116.279 ; pad.0@110.95,116.006 v1(110.95,117.373)
IRQ: SPI1.1 SPI2.1 U1.11 | length 28.4
  Top Layer w0.254: 96.749,96.755 cw(c97.86,96.755) v1@97.074,97.541 ; 96.749,97.368 cw(c97.247,97.368) v1@96.895,97.72 ; U1.11@96.952,89.902 96.952,91.923 ; 96.952,90.841 ccw(c97.413,90.841) U1.11@97.087,90.514 ; v1(96.952,97.663) 96.749,97.46 96.749,92.126 96.952,91.923 ; 105.537,98.501 105.537,97.155 100.127,91.745 97.13,91.745 96.952,91.923
  Top Layer w0.7: 105.537,98.501 SPI1.1@105.537,100.032
  Bottom Layer w0.254: v1@96.829,97.785 ccw(c96.534,98.081) 96.952,98.081 ccw(c97.369,98.081) v1@97.074,97.785 ; v1(96.952,97.663) 96.952,98.222 97.6,98.87
  Bottom Layer w0.6: 97.6,98.87 97.6,101.803
L-G: pad.0@101.6,120.36 R1.1 | length 29.7
  Top Layer w0.254: R1.1@89.387,104.656 R1.1@89.5,104.769
  Top Layer w0.8: R1.1@89.3,104.769 v1(89.3,105.704)
  Bottom Layer w0.254: v1@89.178,105.826 ccw(c88.882,106.121) 89.3,106.121 ccw(c89.718,106.121) v1@89.422,105.826 ; v1(89.3,105.704) 89.3,110.458 90.068,111.227 91.592,111.227 92.278,111.912 92.278,118.593 93.517,119.832 pad.0@101.468,119.832 ; v1@89.3,105.904 v1@89.5,105.704 ; 100.004,119.832 ccw(c100.004,121.536) pad.0@101.209,120.331 ; 100.526,119.832 cw(c100.526,118.866) pad.0@101.209,119.549 ; 100.617,119.832 ccw(c100.617,120.923) pad.0@101.389,120.151
L-G-D: G.1 R1.2 U1.17 | length 74.6
  Top Layer w0.254: v1@90.225,90.581 cw(c89.93,90.286) 90.348,90.286 cw(c90.765,90.286) v1@90.47,90.581 ; v1(90.348,90.703) 90.348,89.129 90.799,88.677 U1.17@91.775,88.677 ; U1.17@91.163,88.59 ccw(c90.953,88.38) 90.953,88.677 ccw(c90.953,88.974) U1.17@91.163,88.764 ; v1(92.024,80.239) 92.913,80.239 93.828,79.324 93.828,74.778 v1(93.345,74.295) v1@93.345,74.447 ; v1@92.147,80.116 cw(c92.442,79.821) 92.442,80.239 cw(c92.442,80.656) v1@92.147,80.361 ; v1@93.345,74.468 ccw(c93.345,74.886) 93.64,74.59 ccw(c93.936,74.295) v1@93.518,74.295 ; G.1@107.6,67.273 ccw(c107.6,67.967) 108.091,67.476 ; G.1@107.7,66.85 107.7,67.085 108.433,67.818 108.433,68.961 108.8,69.329 109.943,69.329 110.947,70.333 110.947,72.542 v1(110.211,73.279) ; G.1@107.973,66.9 cw(c109.08,66.9) 108.297,67.683 ; v1@110.211,73.106 cw(c110.211,72.688) 110.506,72.984 cw(c110.801,73.279) v1@110.384,73.279
  Top Layer w0.8: v1(89.3,102.083) R1.2@89.3,103.069
  Bottom Layer w0.254: v1@89.178,101.96 cw(c88.882,101.665) 89.3,101.665 cw(c89.718,101.665) v1@89.422,101.96 ; v1(89.3,102.083) 89.3,91.751 v1(90.348,90.703) 90.805,91.161 92.354,91.161 94.971,88.544 94.971,86.614 92.024,83.668 v1(92.024,80.239) ; v1@90.175,90.703 ccw(c89.757,90.703) 90.052,90.999 ccw(c90.348,91.294) 90.348,90.876 ccw(c90.348,91.294) 90.643,90.999 ccw(c90.938,90.703) v1@90.521,90.703 ; v1@91.902,80.361 ccw(c91.607,80.656) 92.024,80.656 ccw(c92.442,80.656) v1@92.147,80.361 ; v1(93.345,74.295) 94.783,75.733 106.416,75.733 108.871,73.279 v1(110.211,73.279) ; v1@93.345,74.468 ccw(c93.345,74.886) 93.64,74.59 ccw(c93.936,74.295) v1@93.518,74.295 ; v1@110.088,73.157 ccw(c109.793,72.861) 109.793,73.279 ccw(c109.793,73.697) v1@110.088,73.401
L-R: 
L-R-D: R2.2 R.1 U1.10 | length 124.8
  Top Layer w0.254: v1@82.931,70.333 84.455,70.333 85.039,69.748 89.002,69.748 89.814,68.936 90.551,68.936 91.338,69.723 94.183,69.723 95.047,68.859 95.047,67.488 97.612,64.922 v1@97.815,64.922 ; v1@83.053,70.236 cw(c83.287,70.002) 83.287,70.333 ; v1@83.053,70.48 ccw(c83.41,70.837) 83.41,70.333 ; v1(93.802,86.563) 95.326,86.563 97.8,89.037 U1.10@97.8,89.902 97.8,90.968 98.044,91.211 100.33,91.211 106.274,97.155 ; v1@93.925,86.441 cw(c94.22,86.146) 94.22,86.563 cw(c94.22,86.981) v1@93.925,86.686 ; 97.112,65.423 ccw(c97.841,66.152) v1@97.841,65.121 ; 97.35,88.587 ccw(c96.559,89.377) U1.10@97.677,89.377 ; U1.10@97.713,89.29 cw(c97.503,89.08) 97.8,89.08 cw(c98.097,89.08) U1.10@97.887,89.29 ; U1.10@97.713,90.514 ccw(c97.503,90.724) 97.8,90.724 ccw(c98.097,90.724) U1.10@97.887,90.514 ; 97.783,89.02 ccw(c97.426,89.377) U1.10@97.931,89.377 ; R.1@106,67.273 ccw(c106,67.967) 106.491,67.476 ; R.1@106.1,66.85 106.1,67.086 v1(107.594,68.58) ; v1@106.16,97.406 cw(c105.941,97.155) 106.274,97.155 ; v1(106.274,97.536) 106.274,97.155 ; R.1@106.373,66.9 cw(c107.48,66.9) 106.697,67.683 ; v1@106.387,97.406 ccw(c106.607,97.155) 106.274,97.155 ; v1@107.421,68.58 cw(c107.004,68.58) 107.299,68.285 cw(c107.594,67.989) v1@107.594,68.407 ; R2.2@114.236,119.732 116.619,117.348 118.618,117.348 120.091,115.875 120.091,108.788 117.272,105.969 117.272,103.911 v1@115.697,102.337 ; R2.2@114.4,119.359 cw(c114.4,118.855) 114.756,119.211 ; R2.2@114.519,119.732 ccw(c115.203,119.732) R2.2@114.719,119.248 ; R2.2@114.773,119.732 ccw(c116.07,119.732) 115.153,118.814 ; v1@115.895,102.133 cw(c116.865,102.133) 116.179,102.819
  Bottom Layer w0.254: 82.652,70.837 ccw(c83.41,70.837) v1@82.874,70.301 ; 82.652,71.45 ccw(c84.023,71.45) v1@83.053,70.48 ; v1@82.956,70.333 82.652,70.637 82.652,74.295 82.931,74.574 82.931,74.589 85.787,77.445 86.596,77.445 88.163,79.012 88.163,80.054 91.44,83.33 91.44,83.896 93.802,86.258 ; v1(93.802,86.563) 93.802,86.258 ; v1@97.841,64.775 cw(c97.841,64.357) 98.136,64.652 cw(c98.431,64.948) v1@98.014,64.948 ; v1(97.841,64.948) 98.628,64.16 104.232,64.16 106.578,66.507 106.578,67.564 v1(107.594,68.58) ; v1(106.274,97.536) 106.36,97.622 106.674,97.307 ; v1@106.338,97.376 cw(c106.455,97.088) 106.674,97.307 ; v1@107.421,68.58 cw(c107.004,68.58) 107.299,68.285 cw(c107.594,67.989) v1@107.594,68.407 ; v1@115.549,102.133 cw(c115.132,102.133) 115.427,101.838 cw(c115.722,101.543) v1@115.722,101.96 ; v1(115.722,102.133) 114.478,100.889 111.35,100.889 107.769,97.307 106.674,97.307 ; 93.802,86.258 cw(c93.984,86.258) 93.891,86.415 ccw(c93.984,86.258) 93.802,86.258 ; 93.802,86.258 ccw(c93.62,86.258) 93.714,86.415 cw(c93.62,86.258) 93.802,86.258 ; 93.291,85.748 ccw(c92.476,86.563) 93.629,86.563 cw(c92.476,86.563) 93.291,85.748 ; 93.725,86.181 ccw(c93.343,86.563) 93.883,86.563 cw(c93.343,86.563) 93.725,86.181
  other v1: 82.931,70.358
LED-G: 
LED-R: pad.0@106.68,120.36 R2.1 | length 10.7
  Top Layer w0.254: pad.0@106.68,119.832 106.68,119.609 pad.0@106.883,119.609 ; R2.1@112.536,119.507 R2.1@112.536,119.732
  Top Layer w0.3: pad.0@106.843,120.103 ccw(c107.496,120.756) 107.496,119.832 ; pad.0@107.055,119.565 cw(c107.698,118.922) 107.698,119.832 ; pad.0@107.055,120.315 ccw(c108.221,121.481) 108.221,119.832 ; pad.0@107.106,119.832 108.763,119.832 R2.1@112.451,119.832 ; 111.514,119.832 cw(c111.514,118.645) R2.1@112.353,119.484 ; 111.997,119.832 ccw(c111.997,120.335) R2.1@112.353,119.979
  Top Layer w0.5: R2.1@112.451,119.832 112.536,119.747 R2.1@112.536,119.507
  Top Layer w0.6: pad.0@106.883,119.609 pad.0@107.106,119.832
MISO: SPI1.2 SPI2.2 U1.2 | length 38.8
  Top Layer w0.254: v1@97.922,97.663 cw(c97.504,97.663) 97.799,97.368 cw(c98.095,97.072) v1@98.095,97.49 ; v1(98.095,97.663) 97.307,96.876 97.307,92.634 97.684,92.258 99.598,92.258 104.267,96.926 104.267,97.815 ; v1@100.132,92.964 cw(c99.714,92.964) 100.009,92.669 cw(c100.305,92.373) v1@100.305,92.791 ; v1@100.305,93.137 ccw(c100.305,93.555) 100.6,93.259 ccw(c100.895,92.964) v1@100.478,92.964 ; 100.768,83.877 v1(101.575,84.684) ; v1@101.402,84.684 cw(c100.984,84.684) 101.279,84.388 cw(c101.575,84.093) v1@101.575,84.511
  Top Layer w0.5: U1.2@99.825,83.877 100.768,83.877
  Top Layer w0.7: 104.267,97.815 SPI1.2@104.267,100.032
  Bottom Layer w0.254: v1@98.014,97.663 cw(c98.493,97.663) 98.154,98.002 ; v1(98.095,97.663) 98.095,97.942 98.87,98.718 ; v1@98.268,97.663 cw(c99.36,97.663) 98.588,98.435 ; 100.111,92.079 cw(c101.19,92.079) v1@100.427,92.842 ; 100.111,92.692 cw(c100.576,92.692) v1@100.247,93.021 ; v1(100.305,92.964) 100.111,92.77 100.111,86.808 101.56,85.359 v1@101.56,84.658 ; v1@101.452,84.806 ccw(c101.193,85.065) 101.56,85.065 ; 101.56,85.138 ccw(c102.029,85.138) v1@101.697,84.806
  Bottom Layer w0.6: 98.87,98.718 98.87,101.803
MOSI: SPI1.3 SPI2.3 U1.3 | length 36.4
  Top Layer w0.254: v1@95.178,95.661 cw(c94.883,95.366) 95.301,95.366 cw(c95.718,95.366) v1@95.423,95.661 ; 95.301,93.633 ccw(c96.326,93.633) v1@95.601,92.909 ; v1(95.301,95.783) 95.301,92.964 v1(95.479,92.786) ; v1@97.18,86.527 cw(c97.18,85.949) 97.589,86.358 ; v1@97.18,86.766 98.196,85.75 98.196,85.217 98.73,84.684 U1.3@99.825,84.684 ; v1@97.353,86.7 ccw(c97.611,86.7) 97.429,86.518 ; 98.988,84.684 cw(c98.988,84.365) U1.3@99.213,84.59 ; 99.018,84.684 ccw(c99.018,84.959) U1.3@99.213,84.764
  Top Layer w0.7: v1(102.819,97.688) v1@102.997,97.866 ; 102.997,97.997 cw(c102.511,97.997) 102.855,97.653 ccw(c102.52,97.993) 102.997,97.993 SPI1.3@102.997,100.032
  Bottom Layer w0.254: v1@95.178,95.906 ccw(c94.883,96.201) 95.301,96.201 ccw(c95.718,96.201) v1@95.423,95.906 ; v1(95.301,95.783) 95.301,96.215 96.012,96.926 102.057,96.926 v1(102.819,97.688) ; v1(95.479,92.786) 96.088,92.786 97.003,91.872 97.003,86.944 v1@97.18,86.766 ; v1@95.601,92.664 cw(c95.896,92.369) 95.896,92.786 cw(c95.896,93.204) v1@95.601,92.909 ; 97.003,87.547 ccw(c98.027,87.547) v1@97.303,86.822 ; 99.009,96.799 99.009,97.79 100.14,98.921 ; v1@102.646,97.688 cw(c102.229,97.688) 102.524,97.393 cw(c102.819,97.098) v1@102.819,97.515
  Bottom Layer w0.6: 100.14,98.921 100.14,101.803
  other v1: 97.18,86.7